# Altium PCB DSDLink.PcbDoc
Units mil, origin at the board's own origin, x right, y up, seen from the top; angles counter-clockwise.
Board outline 6000 x 4000 mil, 2 copper layers (Top Layer, Bottom Layer); 57 components, 42 nets, 180 pads, 0 vias.
Unrouted connection lines stored in the file: 98.
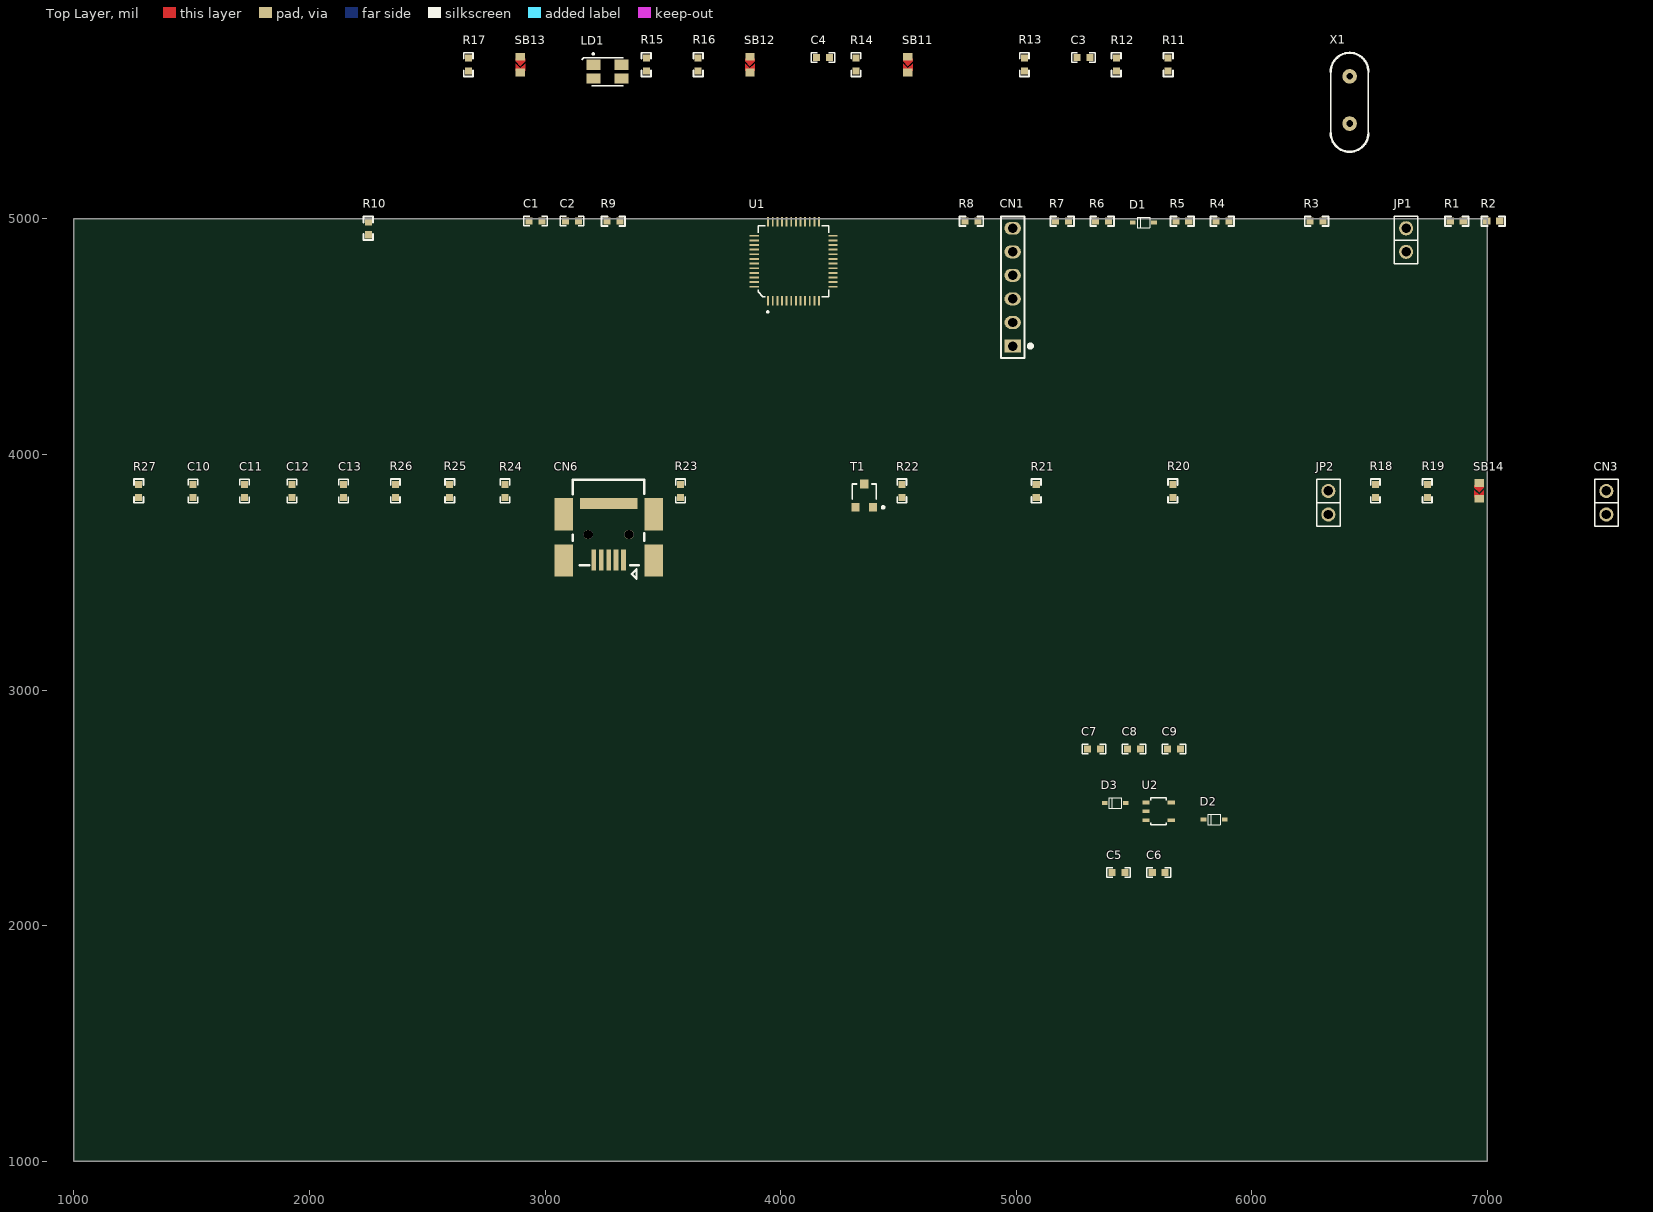
[diagram p0: Top Layer view]
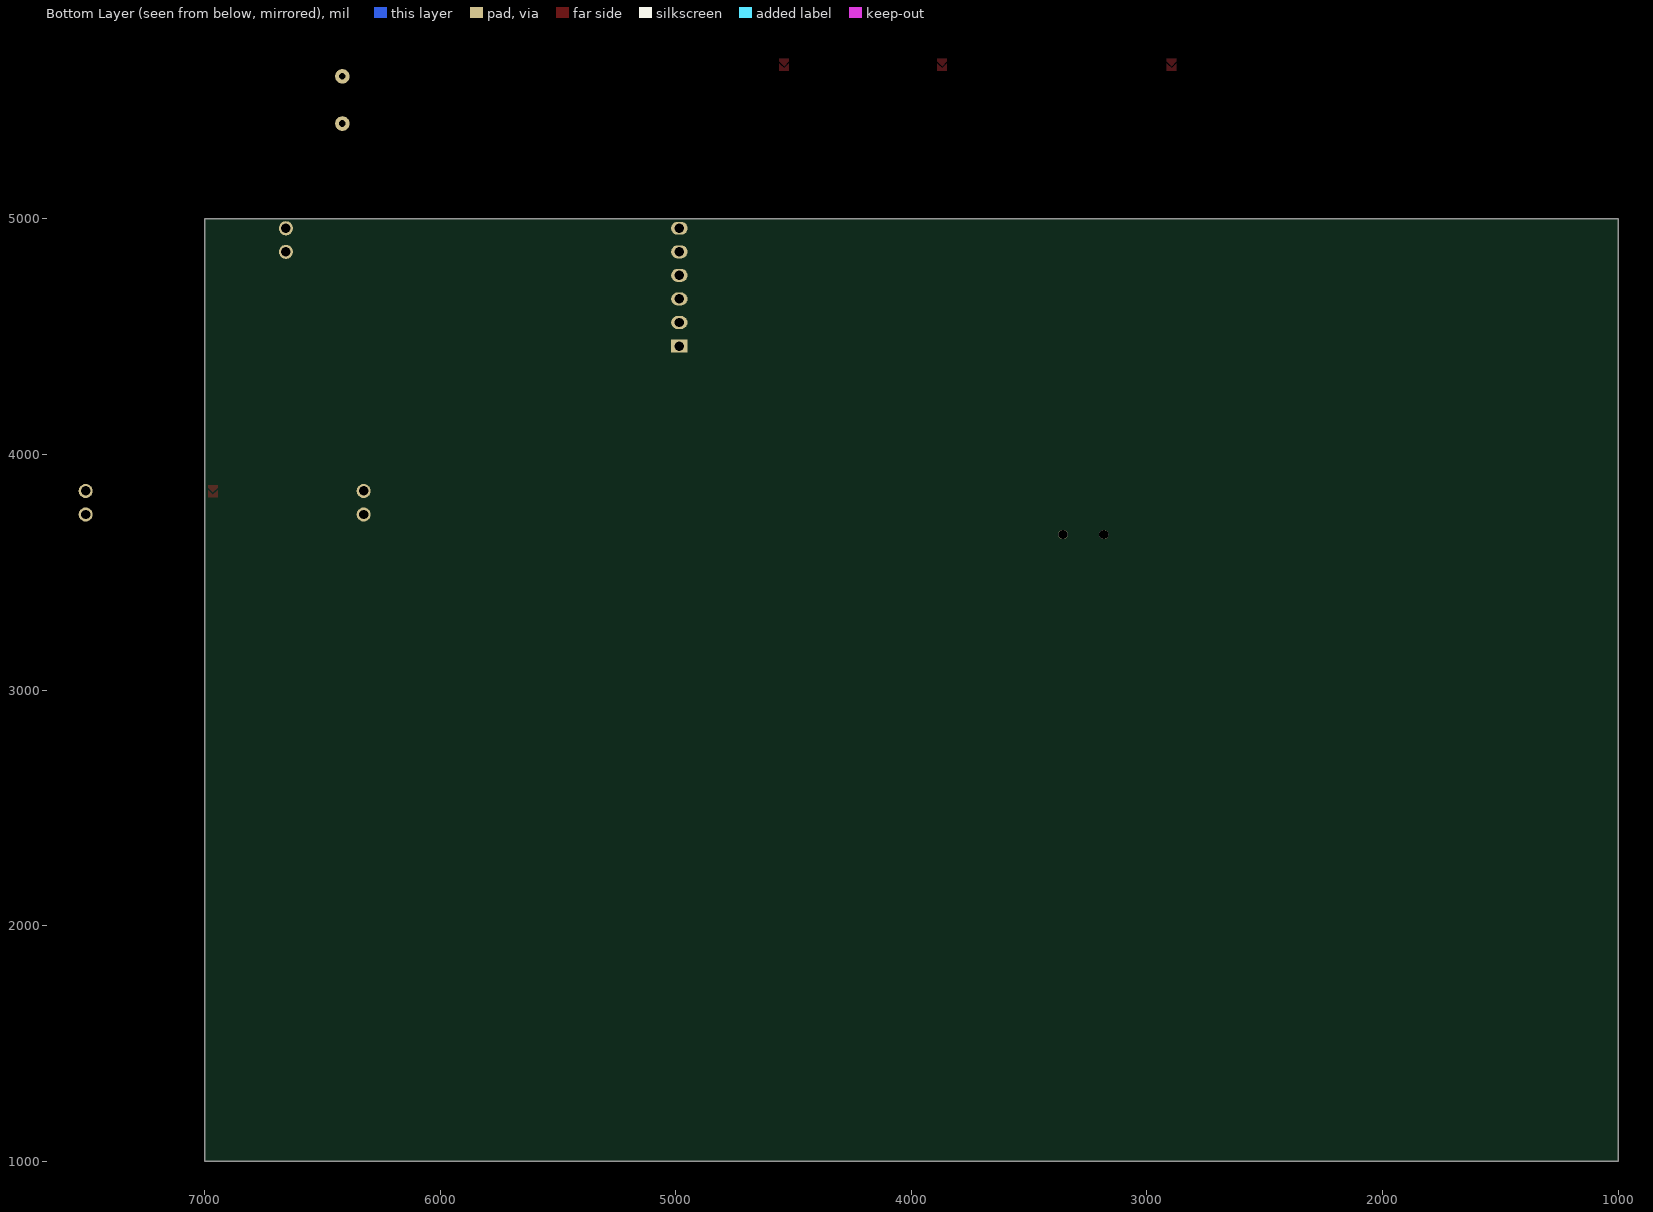
[diagram p1: Bottom Layer view, seen from below]

## Layer stack, top to bottom
Top Solder: solder mask 0.4, Solder Resist, Dk 3.5
Top Layer: signal copper 1.4
Dielectric 1: dielectric 12.6, FR-4, Dk 4.8
Bottom Layer: signal copper 1.4
Bottom Solder: solder mask 0.4, Solder Resist, Dk 3.5

## Board outline
1000,1000 7000,1000 7000,5000 1000,5000

## Design rules (kind name [scope] priority, off if disabled: settings)
Clearance [All] p1: gap=10 ignorepadtopadclearanceinfootprint=FALSE except(0: Arc-Hole Track-Hole SMDPad-Hole THPad-Hole Via-Hole Fill-Hole Poly-Hole Region-Hole Text-Hole)
PolygonConnect [All] p1: connectstyle=Relief reliefconductorwidth=10 reliefentries=4 polygonreliefangle="90 Angle" airgapwidth=10
RoutingVias [All] p1: holewidth=28 width=50 viastyle="Through Hole" minholewidth=28 minwidth=50 maxholewidth=28 maxwidth=50
SolderMaskExpansion [All] p1: expansion=4
Width [All] p1: maxlimit=10 minlimit=10 preferedwidth=10
30 further rules are at their usual default settings.

## Components (designator, comment, footprint, x,y, rotation, side; value= is the part's Value field where it differs from the comment)
C1 "20pF" 0603C 2960,4990 r0 top value=100nF
C2 "20pF" 0603C 3115,4990 r0 top value=100nF
C3 "20pF[N/A]" 0603C 5285,5685 r0 top value=100nF
C4 "100nF" 0603C 4180,5685 r0 top
C5 "1uF_X5R_0603" 0603C 5435,2225 r0 top value=1µF
C6 "1uF_X5R_0603" 0603C 5605,2225 r0 top value=1µF
C7 "100nF" 0603C 5330,2750 r0 top
C8 "10nF_X7R_0603" 0603C 5500,2750 r0 top value=10NF
C9 "100nF" 0603C 5670,2750 r0 top
C10 "100nF" 0603C 1505,3845 r90 top
C11 "100nF" 0603C 1725,3845 r90 top
C12 "100nF" 0603C 1925,3845 r90 top
C13 "100nF" 0603C 2145,3845 r90 top
CN1 "Header 6X1" 1*6P 4985,4460 r90 top
CN3 "" SIP2/2.54 7505,3745 r90 top
CN6 "5075BMR-05-SM" USB-MINI-B-SMD 3270,3660 r0 top
D1 "BAT60JFILM" SOD323/A 5540,4985 r0 top
D2 "BAT60JFILM" SOD323/A 5840,2450 r0 top
D3 "BAT60JFILM" SOD323/A 5420,2520 r0 top
JP1 "" SIP2/2.54 6655,4860 r90 top
JP2 "" SIP2/2.54 6325,3745 r90 top
LD1 "LD_BICOLOR_CMS" HSMF-A201 3265,5625 r0 top
R1 "2K7" 0603R 6870,4990 r0 top value=1K
R2 "4K7" 0603R 7025,4990 r0 top value=1K
R3 "100K" 0603R 6275,4990 r0 top value=10K
R4 "10K" 0603R 5875,4990 r0 top
R5 "10K" 0603R 5705,4990 r0 top
R6 "10K[N/A]" 0603R 5365,4990 r0 top value=10K
R7 "100[N/A]" 0603R 5195,4990 r0 top value=10K
R8 "22" 0603R 4810,4990 r0 top value=10K
R9 "22" 0603R 3290,4990 r0 top value=10K
R10 "22" 0603R 2250,4960 r90 top value=10K
R11 "22" 0603R 5645,5655 r90 top value=10K
R12 "100K" 0603R 5425,5655 r90 top value=10K
R13 "100" 0603R 5035,5655 r90 top value=10K
R14 "4K7" 0603R 4320,5655 r90 top value=10K
R15 "4K7" 0603R 3430,5655 r90 top value=10K
R16 "100" 0603R 3650,5655 r90 top value=10K
R17 "100" 0603R 2675,5655 r90 top value=10K
R18 "100" 0603R 6525,3845 r90 top value=10K
R19 "0" 0603R 6745,3845 r90 top value=10K
R20 "[N/A]" 0603R 5665,3845 r90 top value=1K
R21 "10K" 0603R 5085,3845 r90 top value=1K
R22 "100" 0603R 4515,3845 r90 top value=10K
R23 "36K" 0603R 3575,3845 r90 top value=1K
R24 "1K5" 0603R 2830,3845 r90 top value=10K
R25 "0" 0603R 2595,3845 r90 top value=10K
R26 "0" 0603R 2365,3845 r90 top value=10K
R27 "100K" 0603R 1275,3845 r90 top value=10K
SB11 "Circuit Breaker" JP2_SMD 4540,5655 r90 top
SB12 "Circuit Breaker" JP2_SMD 3870,5655 r90 top
SB13 "Circuit Breaker" JP2_SMD 2895,5655 r90 top
SB14 "Circuit Breaker" JP2_SMD 6965,3845 r90 top
T1 "9013" SOT-23 4355,3825 r0 top
U1 "STM32F103CBT6" "QFP48 7X7" 4055,4820 r0 top
U2 "LD3985M33R" SOT-23-5L 5605,2485 r0 top
X1 "8MHz(12pF)" XTAL1 6415,5405 r90 top

## Footprints (in the part's own frame and the unit in brackets; to place one, negate y for a bottom-side part, rotate by r counter-clockwise, add the part's x,y. Pads: shape width x height; smd on the part's side, far side on the other; paste and mask are expansions set on the pad)
1*6P [mil]
  rect 55x70 hole 40: 1(0,0)
  oval 55x70 hole 40: 2(100,0) 3(200,0) 4(300,0) 5(400,0) 6(500,0)
  silkscreen extent -50,-82 550,50
0603C [mil]
  rect 30x30 smd: 1(27.5,0) 2(-27.5,0)
  silkscreen extent -50,-20 50,20
0603R [mil]
  rect 30x30 smd: 1(27.5,0) 2(-27.5,0)
  silkscreen extent -50,-20 50,20
HSMF-A201 [mm]
  rect 1.5x1.1 smd: 1(-1.5,0.75) 2(1.5,0.75) 3(1.5,-0.75) 4(-1.5,-0.75)
  silkscreen extent -2.79,-1.5 1.7,1.96
JP2_SMD [mil]
  rect 32x40 smd: 1(33.75,0) 2(-33.75,0)
  Top Layer region: -26.25,0 -16.25,0 3.75,-20 -26.25,-20
  Top Layer region: -26.25,0 -16.25,0 3.75,20 -26.25,20
  Top Layer region: 23.75,20 13.75,20 -6.25,0 13.75,-20 23.75,-20
"QFP48 7X7" [mm]
  rect 0.2x1 smd: 1(-2.75,-4.25) 2(-2.25,-4.25) 3(-1.75,-4.25) 4(-1.25,-4.25) 5(-0.75,-4.25) 6(-0.25,-4.25) 7(0.25,-4.25) 8(0.75,-4.25) 9(1.25,-4.25) 10(1.75,-4.25) 11(2.25,-4.25) 12(2.75,-4.25) 25(2.75,4.25) 26(2.25,4.25) 27(1.75,4.25) 28(1.25,4.25) 29(0.75,4.25) 30(0.25,4.25) 31(-0.25,4.25) 32(-0.75,4.25) 33(-1.25,4.25) 34(-1.75,4.25) 35(-2.25,4.25) 36(-2.75,4.25)
  rect 1x0.2 smd: 13(4.25,-2.75) 14(4.25,-2.25) 15(4.25,-1.75) 16(4.25,-1.25) 17(4.25,-0.75) 18(4.25,-0.25) 19(4.25,0.25) 20(4.25,0.75) 21(4.25,1.25) 22(4.25,1.75) 23(4.25,2.25) 24(4.25,2.75) 37(-4.25,2.75) 38(-4.25,2.25) 39(-4.25,1.75) 40(-4.25,1.25) 41(-4.25,0.75) 42(-4.25,0.25) 43(-4.25,-0.25) 44(-4.25,-0.75) 45(-4.25,-1.25) 46(-4.25,-1.75) 47(-4.25,-2.25) 48(-4.25,-2.75)
  silkscreen extent -3.81,-5.52 3.81,3.81
SIP2/2.54 [mil]
  round 60 hole 40: 1(0,0) 2(100,0)
  silkscreen extent -50,-50 150,50
SOD323/A [mm]
  rect 0.6x0.45 smd: 1(1.143,0) 2(-1.143,0)
  silkscreen extent -0.67,-0.57 0.67,0.57
SOT-23 [mm]
  rect 0.9x0.95 smd: 1(0.95,-1.25) 2(-0.95,-1.25) 3(0,1.25)
  silkscreen extent -1.3,-1.39 2.16,1.25
SOT-23-5L [mil]
  rect 30x16 smd: 1(-53.15,37.4) 2(-53.15,0) 3(-53.15,-37.4) 4(53.15,-37.4) 5(53.15,37.4)
  silkscreen extent -33,-58 32,57
USB-MINI-B-SMD [mm]
  round 1 hole 1 unplated: 0(-2.2,0) 0(2.194,0)
  rect 0.508x2.3 smd: 1(1.597,-2.75) 2(0.797,-2.75) 3(-0.003,-2.75) 4(-0.803,-2.75) 5(-1.603,-2.75)
  rect 2x3.5 smd: 6(-4.853,-2.8) 6(-4.853,2.2) 6(4.847,-2.8) 6(4.847,2.2)
  rect 6.2x1.2 smd: 6(0,3.35)
  silkscreen extent -3.85,-4.76 3.85,5.9
XTAL1 [mil]
  round 62 hole 28: 1(-0.36,-0.2) 2(199.64,-0.2)
  silkscreen extent -120,-80 300,80

## Part data
C1 C2 C3 C4 C7 C9 C10 C11 C12 C13: library part Capacitor_ST, "Capacitor 0402 / 0603 / 0805", Revision="July-2002: Re-released for DXP Platform."
C5 C6: library part "CAP SMD 0603  X5R 1µF 25V 10%", "0603  X5R 1µF", Rated voltage=25V, Temperature Max=+125°C, Temperature Min=-55°C, Tolerance=10%, Order code Farnell=1288202RL, Technology=X5R
C8: library part "CAP SMD 0603  X7R 10000PF 50V 10%", "0603  X7R 10NF", Rated voltage=50V, Temperature Max=+125°C, Temperature Min=-55°C, Tolerance=10%, Order code Farnell=7569548RL, Order code RS=2040779, Technology=X7R
CN1: "Header, 6-Pin, Single row", LatestRevisionDate=17-Jul-2002, LatestRevisionNote="Re-released for DXP Platform.", Publisher="Altium Limited"
CN3 JP1 JP2: library part JP2
  CN3: Fitted=NO
CN6: library part "USB-MINI-typeB connector", "USB-MINI-typeB connector", ECCN=????, Manuf_Part_1=5075BMR-05-SM, Order=5075BMR-05-SM
D1 D2 D3: Manuf_1=STM, Distrib=ST, ECCN_US/EU=EAR99/NEC, Manuf_Part_1=BAT60JFILM, Order=BAT60JFILM, Provided=ST, Revision="July-2002: Re-released for DXP Platform."
LD1: "Bicolor Led", Manuf_1="Avago Technologies", Manuf_Part_1=HSMF-A201-A00J1, cap_dec=----, Distrib=RADIOSPARES, Ref St=xxxxxx
R1 R2 R20 R21 R23: library part Res1, "Resistor", Published=8-Jun-2000, Publisher="Altium Limited", Revision="July-2002: Re-released for DXP Platform."
R3 R4 R5 R6 R7 R8 R9 R10 R11 R12 R13 R14 R15 R16 R17 R18 R19 R22 R24 R25 R26 R27: library part Resistor_ST, "Resistor 0402 / 0603 / 0805"
  R6 R14 R15: Fitted=NO
T1: library part NPN, "NPN Bipolar Transistor", Code - JEDEC=TO-226-AA, Published=8-Jun-2000, Publisher="Altium Limited", Revision="July-2002: Re-released for DXP Platform."
U1: "Medium-density performance line ARM-based 32-bit MCU with 64KB Flash", Manuf_1=STM, Manuf_Part_1=STM32F103C8T6, Distrib=ST, ECCN_US/EU=3A991A2/NEC, Order=STM32F103C8T6, Provided=ST, Ref St=9175981
U2: "Ultra low drop-low noise BiCMOS voltage, regulators low ESR capacitors compatible", Manuf_1=STM, Distrib=ST, ECCN_US/EU=EAR99/NEC, Manuf_Part_1=LD3985M33R, Order=LD3985M33R, Provided=ST, Ref St=9176161
X1: library part XTAL, "Crystal Oscillator", LatestRevisionDate=17-Jul-2002, LatestRevisionNote="Re-released for DXP Platform.", PackageReference=R38, Published=8-Jun-2000, Publisher="Altium Limited"
SB11 SB12 SB13 SB14: Published=24-Mar-1999, Publisher="Altium Limited", Revision="July-2002: Re-released for DXP Platform.", Solder=NO

## Nets (pads, with @x,y where several pads share a name; then routed paths per layer and width w, separated by ;. In a path a pad name is that pad's centre, name@x,y a point inside that pad or via, vN(x,y) a via of type N, cw(c..) or ccw(c..) an arc to the next point about the centre after c; other vN are vias at no path point)
+3V3: R14.1
+3V3_ST_LINK: C6.1 C9.2 C10.2 C11.2 C12.2 C13.2 JP1.1 R12.2 R19.2 R20.1 T1.3 U1.1 U1.9 U1.24 U1.36 U1.48 U2.5
AIN_1: R14.2 R15.2 U1.10
E5V: D2.1 R1.1
GND: C1.2 C2.2 C3.2 C4.1 C5.1 C6.2 C7.1 C8.1 C9.1 C10.1 C11.1 C12.1 C13.1 CN1.3 CN6.5 CN6.6 JP2.1 LD1.1 R2.2 R3.1 R4.1 R5.2 R6.1 R15.1 R23.1 R27.2 SB12.1 U1.8 U1.20 U1.23 U1.35 U1.47 U2.2
LED_STLINK: R17.1 R18.1
MCO: SB11.2
NetC3_1: C3.1 R13.2 SB11.1
NetC5_2: C5.2 C7.2 D2.2 D3.2 U2.1 U2.3
NetC8_2: C8.2 U2.4
NetCN1_1: CN1.1 D1.1 R5.1
NetCN1_2: CN1.2 R8.1
NetCN1_4: CN1.4 R9.1
NetCN1_5: CN1.5 R10.1
NetCN1_6: CN1.6 R11.1
NetCN6_2: CN6.2 R25.1
NetCN6_3: CN6.3 R24.1 R26.1
NetCN6_4: CN6.4 R27.1
NetD1_2: D1.2 R7.1
NetJP1_2: JP1.2 R1.2 R2.1 U1.39
NetJP2_2: JP2.2 R20.2 U1.21
NetLD1_2: LD1.2 R17.2
NetLD1_3: LD1.3 R18.2
NetLD1_4: LD1.4 R19.1
NetR3_2: R3.2 U1.44
NetR4_2: R4.2 U1.2
NetR6_2: R6.2 U1.3
NetR13_1: R13.1 U1.29
NetR21_1: R21.1 R22.1 R23.2 T1.2
NetR24_2: R24.2 T1.1
NetSB13_1: SB13.1
NetSB14_1: SB14.1
NetU1_28: U1.28
OSC_IN: C2.1 U1.5 X1.2
OSC_OUT: C1.1 U1.6 X1.1
STLINK_RX: CN3.1 SB14.2 U1.13
STLINK_TX: CN3.2 SB13.2 U1.12
STM_RST: C4.2 R12.1 SB12.2 U1.7
T_JTCK: R8.2
T_JTMS: R9.2 R16.2 U1.27
T_SWDIO_IN: R16.1 U1.25
U5V: CN6.1 D3.1 R21.2
pads on no net: CN6.0 R7.2 R10.2 R11.2 R22.2 R25.2 R26.2 U1.4 U1.11 U1.14 U1.15 U1.16 U1.17 U1.18 U1.19 U1.22 U1.26 U1.30 U1.31 U1.32 U1.33 U1.34 U1.37 U1.38 U1.40 U1.41 U1.42 U1.43 U1.45 U1.46